# Altium PCB Resistor_Box.PcbDoc
Units mil, origin at the board's own origin, x right, y up, seen from the top; angles counter-clockwise.
Board outline 8310 x 2380 mil, 2 copper layers (Top Layer, Bottom Layer); 25 components, 19 nets, 60 pads, 0 vias.
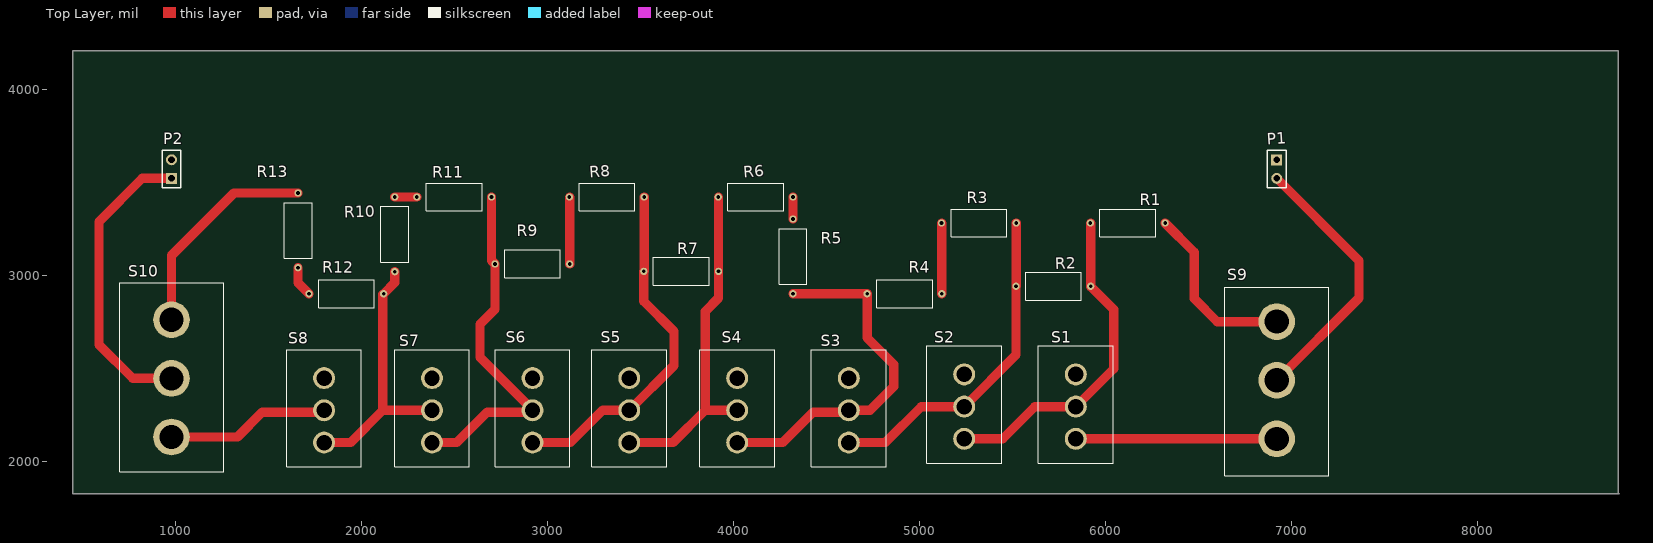
[diagram p0: Top Layer view]
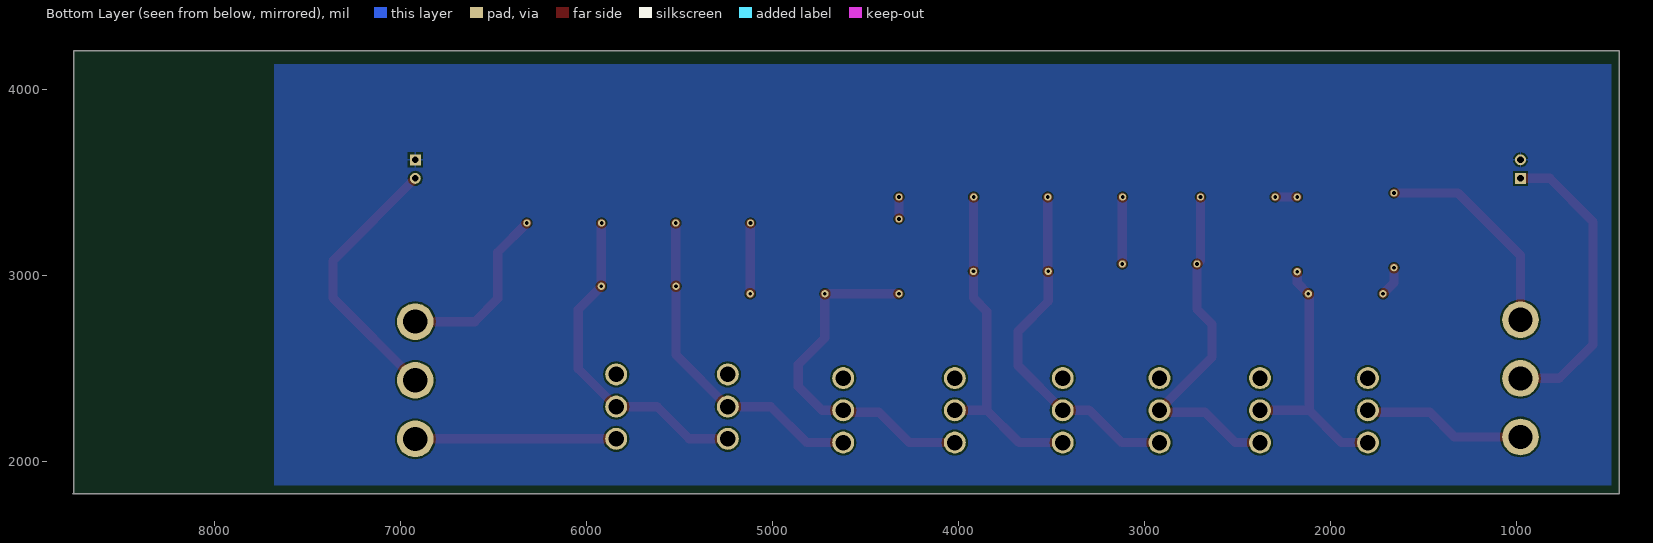
[diagram p1: Bottom Layer view, seen from below]

## Layer stack, top to bottom
Top Layer: signal copper 1.4
Dielectric: dielectric 12.6, FR-4, Dk 4.8
Bottom Layer: signal copper 1.4

## Board outline
450,4205 450,4165 450,1825 8760,1825 8755,1825 8755,4200 8755,4205 450,4205

## Design rules (kind name [scope] priority, off if disabled: settings)
Clearance [All] p1: gap=10
HoleSize [All] p1: absolutevalues=TRUE maxlimit=300 minlimit=1 maxpercent=80.000 minpercent=20.000
PolygonConnect [All] p1: connectstyle=Relief reliefconductorwidth=10 reliefentries=4 polygonreliefangle="90 Angle"
RoutingVias [All] p1: holewidth=28 width=50 viastyle="Through Hole" minholewidth=28 minwidth=50 maxholewidth=28 maxwidth=50
SilkscreenOverComponentPads [All] p1: minsilkscreentomaskgap=10
SolderMaskExpansion [All] p1: expansion=4
Width [All] p1: maxlimit=100 minlimit=50 preferedwidth=50
26 further rules are at their usual default settings.

## Components (designator, comment, footprint, x,y, rotation, side; value= is the part's Value field where it differs from the comment)
P1 "Header 1" HDR1X2 6920,3620 r270 top
P2 "Header 2" HDR1X2 980,3520 r90 top
R1 "Res2" RESIST 6320,3280 r180 top
R2 "Res2" RESIST 5920,2940 r180 top
R3 "Res2" RESIST 5520,3280 r180 top
R4 "Res2" RESIST 5120,2900 r180 top
R5 "Res2" RESIST 4320,2900 r90 top
R6 "Res2" RESIST 4320,3420 r180 top
R7 "Res2" RESIST 3920,3020 r180 top
R8 "Res2" RESIST 3520,3420 r180 top
R9 "Res2" RESIST 3120,3060 r180 top
R10 "Res2" RESIST 2180,3420 r270 top
R11 "Res2" RESIST 2700,3420 r180 top
R12 "Res2" RESIST 2120,2900 r180 top
R13 "Res2" RESIST 1660,3040 r90 top
S1 "SW-SPST" SPST 5840,2120 r0 top
S2 "SW-SPST" SPST 5240,2120 r0 top
S3 "SW-SPST" SPST 4620,2100 r0 top
S4 "SW-SPST" SPST 4020,2100 r0 top
S5 "SW-SPST" SPST 3440,2100 r0 top
S6 "SW-SPST" SPST 2920,2100 r0 top
S7 "SW-SPST" SPST 2380,2100 r0 top
S8 "SW-SPST" SPST 1800,2100 r0 top
S9 "SW-SPDT" SPDT 6920,2120 r0 top
S10 "SW-SPDT" SPDT 980,2760 r180 top

## Footprints (in the part's own frame and the unit in brackets; to place one, negate y for a bottom-side part, rotate by r counter-clockwise, add the part's x,y. Pads: shape width x height; smd on the part's side, far side on the other; paste and mask are expansions set on the pad)
HDR1X2 [mm] "Connector; Header; 2 Position"
  rect 1.5x1.5 hole 0.9: 1(0,0)
  round 1.5 hole 0.9: 2(2.54,0)
  silkscreen extent -1.27,-1.27 3.81,1.27
RESIST [mm]
  round 1 hole 0.5: 1(0,0) 2(10.2,0)
  silkscreen extent 1.27,-1.91 8.89,1.91
SPDT [mm]
  round 5 hole 3.3: 1(0,0) 2(0,8) 3(0,16)
  silkscreen extent -7.1,-5.03 7.1,20.72
SPST [mm]
  round 3 hole 2.1: 1(0,0) 2(0,4.4) 3(0,8.8)
  silkscreen extent -5.1,-3.3 5.1,12.7

## Part data
P1: library part "Header 2", "Header, 2-Pin"
P2: "Header, 2-Pin"
R1 R2 R3 R4 R5 R6 R7 R8 R9 R10 R11 R12 R13: "Resistor"
S1 S2 S3 S4 S5 S6 S7 S8: "Single-Pole, Single-Throw Switch"
S9 S10: "SPDT Subminiature Toggle Switch, Right Angle Mounting, Vertical Actuation"

## Nets (pads, with @x,y where several pads share a name; then routed paths per layer and width w, separated by ;. In a path a pad name is that pad's centre, name@x,y a point inside that pad or via, vN(x,y) a via of type N, cw(c..) or ccw(c..) an arc to the next point about the centre after c; other vN are vias at no path point)
GND: P1.1 P2.2
NetP1_2: P1.2 S9.2 | length 1451.4
  Top Layer w50: S9.2 7362.2,2877.17 7362.2,3077.8 P1.2
NetP2_1: P2.1 S10.2 | length 1611.4
  Top Layer w50: S10.2 771.81,2445.04 590.55,2626.3 590.55,3287.4 823.15,3520 P2.1
NetR1_1: R1.1 S9.3 | length 965.8
  Top Layer w50: R1.1 6476.38,3123.62 6476.38,2874.02 6600.47,2749.92 S9.3
NetR1_2: R1.2 R2.1 S1.2 S2.1 | length 1790.5
  Top Layer w50: S2.1 5446.77,2120 5620,2293.23 S1.2 6043.31,2496.54 6043.31,2814.96 R2.1@5920,2938.27 ; R2.1 R1.2@5920,3278.43
NetR2_2: R2.2 R3.1 S2.2 S3.1 | length 1800.6
  Top Layer w50: S3.1 4816.54,2100 5009.76,2293.23 S2.2 5518.43,2571.65 R2.2 ; R2.2@5520,2941.57 R3.1
NetR3_2: R3.2 R4.1 | length 378.4
  Top Layer w50: R4.1 R3.2@5120,3278.43
NetR4_2: R4.2 R5.1 S3.2 S4.1 | length 1910.2
  Top Layer w50: S4.1 4265.35,2100 4429.13,2263.78 S3.2@4610.55,2263.78 ; R5.1 R4.2 4718.43,2663.46 4862.2,2519.68 4862.2,2401.57 4733.86,2273.23 S3.2
NetR5_2: R5.2 R6.1 | length 118.4
  Top Layer w50: R5.2 R6.1
NetR6_2: R6.2 R7.1 S4.2 S5.1 | length 1826.8
  Top Layer w50: S5.1 3674.8,2100 3848.03,2273.23 ; R6.2@3920,3418.43 R7.1 3920,2876.69 3848.03,2804.72 3848.03,2273.23 ; S4.2 3848.03,2273.23
NetR7_2: R7.2 R8.1 S5.2 S6.1 | length 1904.2
  Top Layer w50: S6.1 3123.62,2100 3296.85,2273.23 S5.2 3681.1,2514.33 3681.1,2696.85 3518.43,2859.53 R7.2 ; R7.2@3520,3021.57 R8.1
NetR8_2: R8.2 R9.1 | length 358.4
  Top Layer w50: R9.1 R8.2@3120,3418.43
NetR9_2: R9.2 R11.1 S6.2 S7.1 | length 1908.6
  Top Layer w50: S7.1 2513.39,2100 2677.17,2263.78 2910.55,2263.78 2910.55,2286.3 2637.8,2559.06 2637.8,2736.22 2718.43,2816.85 R9.2 2700,3078.43 R11.1
NetR10_1: R10.1 R11.2 | length 118.4
  Top Layer w50: R10.1 R11.2
NetR10_2: R10.2 R12.1 S7.2 S8.1 | length 1417.6
  Top Layer w50: S8.1 1942.52,2100 2115.75,2273.23 ; R12.1@2115.75,2895.75 2115.75,2273.23 ; R12.1 2180,2960 R10.2 ; S7.2 2115.75,2273.23
NetR12_2: R12.2 R13.1 | length 164.2
  Top Layer w50: R13.1 1660,2958.43 R12.2
NetR13_2: R13.2 S10.1 | length 1165
  Top Layer w50: S10.1 980,3105.98 1315.59,3441.57 R13.2
NetS1_1: S1.1 S9.1 | length 1080
  Top Layer w50: S1.1 S9.1
NetS8_2: S8.2 S10.3 | length 865.9
  Top Layer w50: S10.3 1334.49,2130.08 1468.19,2263.78 S8.2@1790.55,2263.78
pads on no net: S1.3 S2.3 S3.3 S4.3 S5.3 S6.3 S7.3 S8.3

## Polygon pours and split planes (outlines as drawn)
GND on Bottom Layer "GND" (solid, pour order 1000): 492.13,4133.86 492.13,1870.08 7696.85,1870.08 7677.11,1870.08 7677.11,4133.86 492.13,4133.86 492.13,1870.08

## Silkscreen, mask and mechanical layers (free items; w line width, h text height)
Mechanical 1:
  lines w10: 492.13,1870.08 492.13,4133.86 7677.17,4133.86 7677.17,1870.08 492.13,1870.08